# Altium PCB PCB.PcbDoc (part 3 of 3)
Units mm, origin at the board's own origin, x right, y up, seen from the top; angles counter-clockwise.
Board outline 50 x 32.5 mm, 10 copper layers (Top (GND), L2 (HS), L3 (GND), L4 (VCC), L5 (S), L6 S(), L7 (VCC), L8 (GND), L9 (VCC), Bottom (S)), stack 1.18 mm thick; 115 components, 126 nets, 603 pads, 417 vias.
Unrouted connection lines stored in the file: 2.
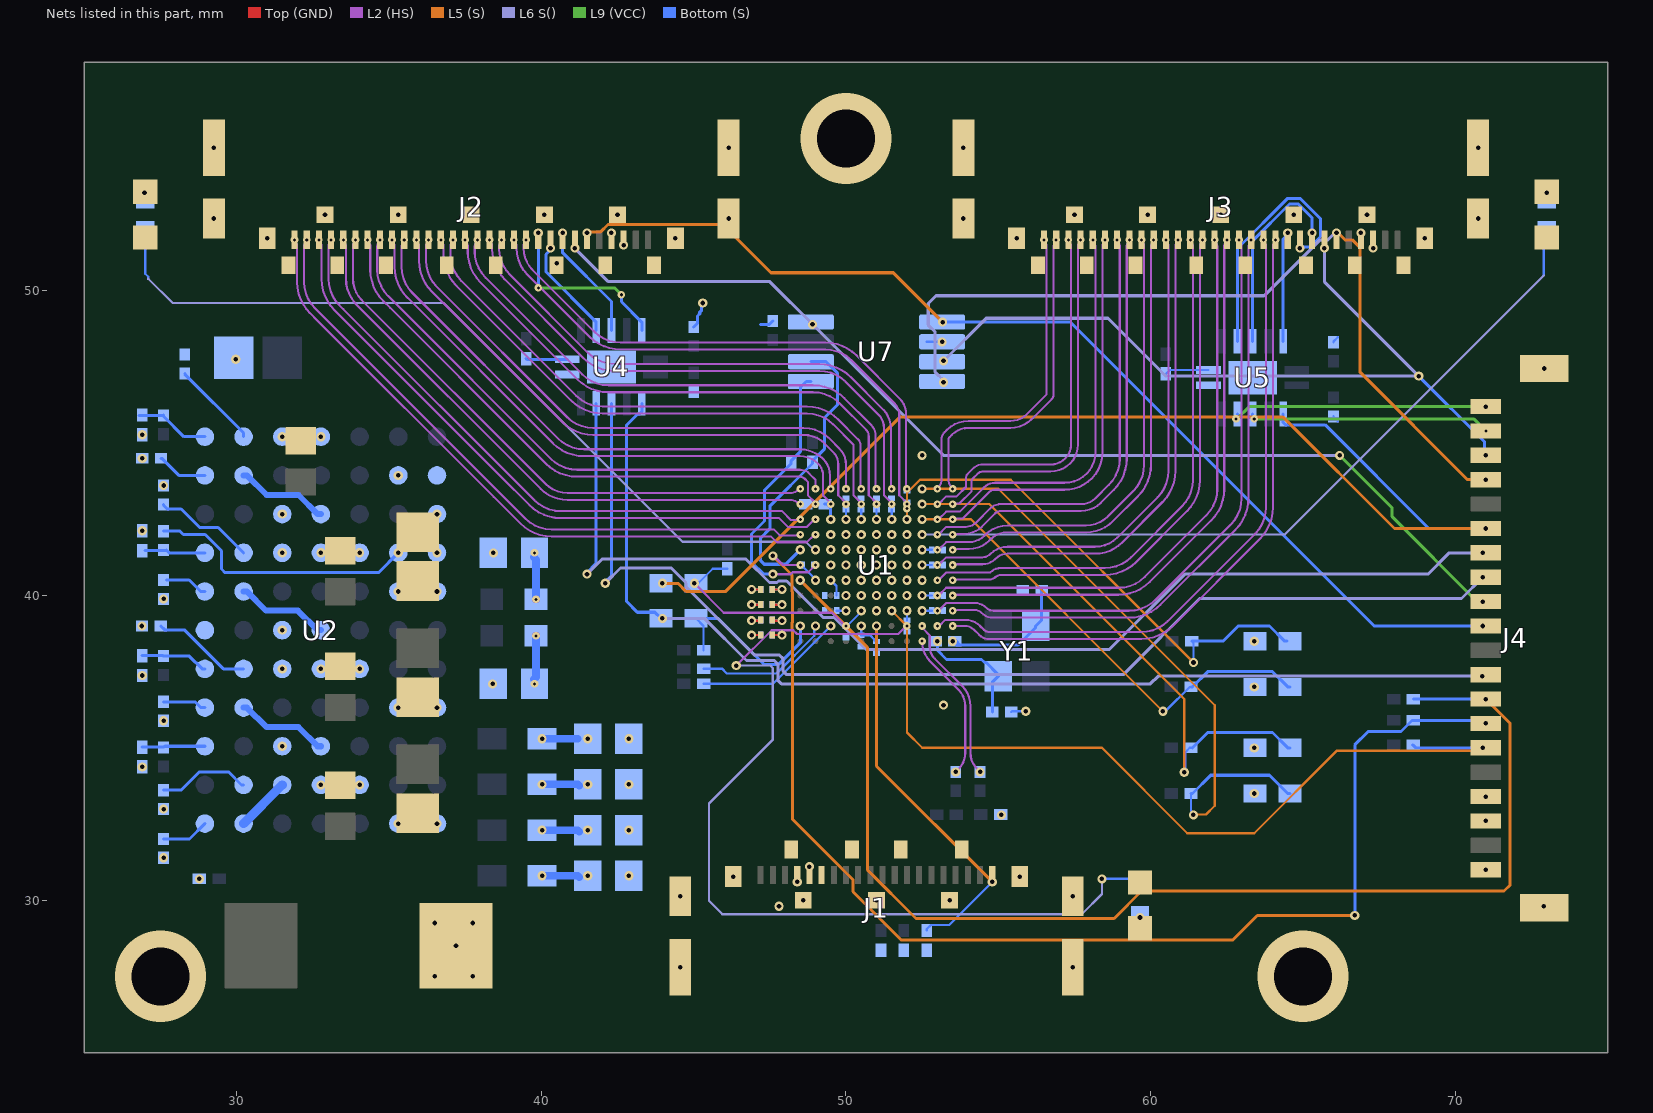
[diagram p10: the nets of this part, all layers, seen from the top]

## Via types
v1: diameter 0.3, hole 0.15, Top (GND) to Bottom (S), 287 vias
v2: diameter 0.25, hole 0.1, Top (GND) to L2 (HS), 104 vias
v3: diameter 0.25, hole 0.1, L9 (VCC) to Bottom (S), 22 vias
v4: diameter 3, hole 1.9, Top (GND) to Bottom (S), 3 vias
v5: diameter 0.25, hole 0.1, Top (GND) to Bottom (S), 1 vias

## Nets (pads, with @x,y where several pads share a name; then routed paths per layer and width w, separated by ;. In a path a pad name is that pad's centre, name@x,y a point inside that pad or via, vN(x,y) a via of type N, cw(c..) or ccw(c..) an arc to the next point about the centre after c; other vN are vias at no path point) (continued)
GND: C3.2 C4.1 C5.1 C6.1 C7.1 C8.1 C9.1 C10.1 C11.1 C12.2 C13.1 C14.1 C15.1 C16.1 C17.1 C18.1 C19.1 C20.1 C21.1 C22.1 C23.1 C24.1 C25.1 C26.1 C27.1 C28.1 C29.1 C30.1 C31.1 C32.1 C33.1 C34.1 C35.1 C36.1 C37.1 C38.1 C39.1 C40.1 C41.1 C42.1 C44.1 C47.1 C48.1 C49.1 C50.1 C51.1 C53.1 C54.1 C55.1 C56.1 C57.1 C58.1 C59.1 C60.2 D8.2 D9.2 D10.2 J1.4 J1.5 J1.6 J1.S1 J1.S2 J1.S3 J1.S4 J1.S5 J1.S6 J1.S7 J1.S8 J1.S9 J1.S10 J1.S11 J1.S12 J1.S13 J2.3 J2.4 J2.S1 J2.S2 J2.S3 J2.S4 J2.S5 J2.S6 J2.S7 J2.S8 J2.S9 J2.S10 J2.S11 J2.S12 J2.S13 J2.S14 J2.S15 J2.S16 J2.S17 J2.S18 J2.S19 J3.3 J3.4 J3.S1 J3.S2 J3.S3 J3.S4 J3.S5 J3.S6 J3.S7 J3.S8 J3.S9 J3.S10 J3.S11 J3.S12 J3.S13 J3.S14 J3.S15 J3.S16 J3.S17 J3.S18 J3.S19 J4.3 J4.4 J4.21 J4.22 R5.1 R7.1 R14.1 R20.1 R21.2 R22.1 R30.1 R31.1 R32.1 R33.1 R43.1 R44.1 R45.1 R46.1 U1.E4 U1.E5 U1.E6 U1.E7 U1.E8 U1.F4 U1.F5 U1.F6 U1.F7 U1.F8 U1.F9 U1.G4 U1.G5 U1.G6 U1.G7 U1.G8 U1.G9 U2.A4 U2.A5 U2.B1 U2.B2 U2.C5 U2.D3 U2.D4 U2.D5 U2.E1 U2.E2 U2.F5 U2.F7 U2.G3 U2.G4 U2.G5 U2.H1 U2.H2 U2.J5 U2.K3 U2.K4 U2.L1 U2.L2 U4.7 U4.15 U5.7 U5.15 U7.6 | length 7.5
  Top (GND) w0.075: J2.S10@40.5,50.835 v1(40.5,50.9) ; v1(46.9,38.7) C6.1@47.2,38.7 ; v1(46.9,39.175) 47.175,39.175 C11.1@47.2,39.2 ; v1(46.9,39.7) C10.1@47.2,39.7 ; v1(46.9,40.2) C8.1@47.2,40.2 ; v1(50,40.5) U1.E8@50,40.515 ; v1(51,40.5) U1.E6@51,40.515 ; v1(51.5,40.5) U1.E5@51.5,40.515 ; v1(52,41) 52.015,41 U1.F4@52.038,40.977
  Top (GND) w0.1: v1(32.766,37.592) 33.317,37.592 C34.1@33.4,37.675 ; v1(32.766,41.402) 33.327,41.402 C33.1@33.4,41.475 33.473,41.402 v1(34.036,41.402) ; v1(72.9,29.8) 72.92,29.78 J4.21@72.92,29.75
  Bottom (S) w0.075: v1(46.9,38.7) C7.1@47.2,38.7 ; v1(46.9,39.175) 47.175,39.175 C5.1@47.2,39.2 ; v1(46.9,39.7) C9.1@47.2,39.7 ; v1(46.9,40.2) C4.1@47.2,40.2 ; U7.6@52.65,48.325 v1(53.155,48.325) ; C12.2@55.422,36.175 55.447,36.2 v1(55.9,36.2) ; C41.1@66,45.88 66,45.855 C41.1@66.138,45.718 ; C42.1@66,48.31 66,48.335 C42.1@66.138,48.472
  Bottom (S) w0.1: C40.1@45,48.81 45.125,48.935 45.125,49.171 45.2,49.246 45.2,49.3 45.262,49.362 45.262,49.562 v1(45.3,49.6) ; 47.2,48.9 47.49,48.9 C44.1@47.6,49.01 ; R43.1@55.075,32.81 55.09,32.81 v1(55.1,32.8)
  other v1: 36.5,27.5 37.75,27.5 44.555,27.8 57.445,27.8 37.2,28.5 36.5,29.25 37.75,29.25 47.8,29.8 48.6,30 51,30 53.4,30 44.555,30.125 57.445,30.125 48.4,30.6 28.775,30.7 46.3,30.775 55.7,30.775 42.875,30.8 48.8,31.1 27.6,31.39 42.875,32.3 35.306,32.512 36.576,32.512 71,32.6 27.6,32.99 71,33.4 63.4,33.5 32.766,33.782 34.036,33.782 42.875,33.8 26.9,34.375 63.4,35 31.496,35.052 42.875,35.3 27.6,35.89 35.306,36.322 36.576,36.322 53.2,36.4 63.4,37 38.4,37.1 26.9,37.375 31.496,37.592 34.036,37.592 63.4,38.5 31.496,38.862 26.89,39 27.6,39.89 35.306,40.132 36.576,40.132 50.5,40.5 52,40.5 49.5,41 50,41 50.5,41 51,41 51.5,41 31.496,41.402 38.425,41.4 49.5,41.5 50,41.5 50.5,41.5 51,41.5 51.5,41.5 52,41.5 26.9,42.125 31.496,42.672 27.6,43.61 35.306,43.942 26.9,44.5 52.5,44.6 31.496,45.212 32.766,45.212 26.9,45.275 72.92,47.45 29.972,47.752 67.3,51.4 42.7,51.5 31,51.725 44.4,51.725 55.6,51.725 69,51.725 42.3,51.9 66.9,51.9 29.255,52.375 46.145,52.375 53.855,52.375 70.745,52.375 32.9,52.5 35.3,52.5 37.7,52.5 40.1,52.5 42.5,52.5 57.5,52.5 59.9,52.5 62.3,52.5 64.7,52.5 67.1,52.5 29.255,54.7 46.145,54.7 53.855,54.7 70.745,54.7
  other v4: 27.5,27.5 65,27.5 50,55
GPIO0: R6.1 R33.2 U1.L3 | length 21.1
  L5 (S) w0.075: v1(52.5,43.5) 55,43.5 62.1,36.4 62.1,33.1 61.812,32.813 61.413,32.813 v1(61.4,32.8)
  Bottom (S) w0.075: R6.1@61.325,33.5 61.325,32.936 61.4,32.861 v1(61.4,32.8)
  Bottom (S) w0.1: R6.1@61.325,33.5 61.37,33.5 61.97,34.1 63.9,34.1 64.5,33.5 R33.2@64.575,33.5
GPIO1: R8.1 R32.2 U1.K3 | length 18.4
  L5 (S) w0.075: v1(52.5,43) 54.7,43 61.1,36.6 v1(61.1,34.2) v1@61.1,34.078
  Bottom (S) w0.075: v1(61.1,34.2) 61.143,34.243 61.143,34.863 61.28,35 R8.1@61.325,35 R8.1@61.37,35
  Bottom (S) w0.1: R8.1@61.37,35 61.87,35.5 64,35.5 64.5,35 R32.2@64.575,35
GPIO2: R9.1 R31.2 U1.J3 | length 15.4
  L5 (S) w0.075: v1(52.5,42.5) 54.1,42.5 v1(60.4,36.2)
  Bottom (S) w0.075: v1(60.4,36.2) 60.443,36.243 60.523,36.243 61.28,37 R9.1@61.325,37
  Bottom (S) w0.1: R9.1@61.325,37 61.37,37 61.87,37.5 64,37.5 64.5,37 R31.2@64.575,37
GPIO3: R10.1 R30.2 U1.J4 | length 17.2
  L5 (S) w0.075: v1(52,42.5) 52,43.371 52.429,43.8 55.406,43.8 v1(61.406,37.8)
  Bottom (S) w0.075: R10.1@61.35,38.5 61.406,38.444 v1(61.406,37.8)
  Bottom (S) w0.1: R10.1@61.35,38.5 62.372,38.5 62.872,39 63.9,39 64.4,38.5 R30.2@64.475,38.5
GPIO4/RST_TX1: R11.1 R23.2 U1.B8 | length 6.8
  L2 (HS) w0.075: v1(45.025,40.4) 45.988,39.437 49.539,39.437 49.977,39 v2(50,39)
  Bottom (S) w0.075: v1(45.025,40.4) 45.15,40.4 45.625,40.875 R11.1@46.1,40.875
GPIO5: R12.1 U1.B9 | length 5
  Bottom (S) w0.075: R12.1@45.325,37.1 47.6,37.1 v1(49.5,39)
  Bottom (S) w0.1: v1@49.5,38.946 v1(49.5,39)
GPIO6: R13.1 U1.B10 | length 4.6
  Bottom (S) w0.075: R13.1@45.325,37.6 45.927,37.6 46.089,37.437 47.717,37.437 48.957,38.677 48.957,38.957 v1(49,39)
GPIO7/RST_TX0: R15.1 R24.2 U1.B11 | length 6
  Bottom (S) w0.075: R24.2@45.075,39.25 45.325,39 R15.1@45.325,38.2
  Bottom (S) w0.1: R24.2@45.075,39.25 45.8,39.25 47.31,37.74 47.79,37.74 48.5,38.45 v1(48.5,39)
HPD: J1.20 R46.2 U1.B6 | length 12.8
  L5 (S) w0.1: v1(51,39) 51,34.4 v1(54.8,30.6)
  Bottom (S) w0.075: R46.2@52.65,29.005 52.65,29.05 52.787,29.188 53.388,29.188 v1(54.8,30.6)
INTVCC1: U2.B6 U2.C4 | length 3.1
  Bottom (S) w0.2: U2.B6@30.226,43.942 30.337,43.942 30.981,43.298 32.029,43.298 32.655,42.672 U2.C4@32.766,42.672
INTVCC2: U2.E6 U2.F4 | length 3.1
  Bottom (S) w0.2: U2.E6@30.226,40.132 30.337,40.132 30.963,39.506 32.011,39.506 32.655,38.862 U2.F4@32.766,38.862
INTVCC3: U2.H6 U2.J4 | length 3.1
  Bottom (S) w0.2: U2.H6@30.226,36.322 30.337,36.322 30.981,35.678 32.029,35.678 32.655,35.052 U2.J4@32.766,35.052
INTVCC4: U2.K5 U2.L6 | length 1.8
  Bottom (S) w0.3: U2.L6@30.226,32.512 U2.K5@31.496,33.782
MSCL: R18.1 U1.F10 U7.1 | length 9.2
  L2 (HS) w0.075: v1(47.6,40.7) 48.18,40.7 48.243,40.763 48.763,40.763 v2(49,41)
  Bottom (S) w0.1: v1(47.6,40.7) 47.596,40.704 47.296,40.704 46.9,41.1 46.9,42.018 47.325,42.443 47.325,43.455 48.2,44.33 R18.1@48.2,44.375 48.2,44.42 48.5,44.72 48.5,46.826 48.699,47.025 U7.1@48.845,47.025
MSDA: R19.1 U1.G11 U7.2 | length 9.8
  Bottom (S) w0.1: v1(48.5,41.5) 48.025,41.025 47.317,41.025 47.2,41.142 47.2,41.886 47.5,42.186 47.5,42.93 48.9,44.33 R19.1@48.9,44.375 48.9,44.42 49.3,44.82 49.3,45.843 49.725,46.268 49.725,47.293 49.343,47.675 U7.2@48.845,47.675
NetC43_1: C43.1 R5.2 U2.G7 | length 2.2
  Bottom (S) w0.1: R5.2@26.9,38.025 27.585,38.025 C43.1@27.6,38.01 28.448,38.01 28.866,37.592 U2.G7@28.956,37.592
NetC45_1: C45.1 R20.2 U2.D7 | length 2
  Bottom (S) w0.1: R20.2@27,41.475 27.685,41.475 27.7,41.49 27.788,41.402 U2.D7@28.956,41.402
NetC46_1: C46.1 R22.2 U2.A7 | length 2.5
  Bottom (S) w0.1: R22.2@26.8,45.91 27.585,45.91 27.6,45.925 27.6,45.88 28.268,45.212 U2.A7@28.956,45.212
NetC47_2: C47.2 U2.G6 | length 3.3
  Bottom (S) w0.1: C47.2@27.51,39 27.635,38.875 28.281,38.875 29.564,37.592 U2.G6@30.226,37.592
NetC48_2: C48.2 U2.D6 | length 3.3
  Bottom (S) w0.1: C48.2@27.6,42.99 27.6,42.965 27.725,42.84 28.18,42.84 28.786,42.234 29.394,42.234 U2.D6@30.226,41.402
NetC49_2: C49.2 U2.A6 | length 2.9
  Bottom (S) w0.1: C49.2@28.3,47.29 28.3,47.265 30.226,45.339 U2.A6@30.226,45.212
NetC52_1: C52.1 R14.2 U2.J7 | length 2.1
  Bottom (S) w0.1: R14.2@26.9,35.025 27.615,35.025 27.642,35.052 U2.J7@28.956,35.052
NetC53_2: C53.2 U2.K6 | length 3.1
  Bottom (S) w0.1: C53.2@27.6,33.61 28.176,33.61 28.778,34.212 29.73,34.212 30.16,33.782 U2.K6@30.226,33.782
NetC54_2: C54.2 U2.B7 | length 1.7
  Bottom (S) w0.1: C54.2@27.52,44.5 27.545,44.5 28.103,43.942 U2.B7@28.956,43.942
NetC55_2: C55.2 U2.E7 | length 1.4
  Bottom (S) w0.1: C55.2@27.7,40.51 28.44,40.51 28.818,40.132 U2.E7@28.956,40.132
NetC56_2: C56.2 U2.H7 | length 1.4
  Bottom (S) w0.1: C56.2@27.6,36.51 28.63,36.51 28.818,36.322 U2.H7@28.956,36.322
NetC57_2: C57.2 U2.L7 | length 1.6
  Bottom (S) w0.1: C57.2@27.6,32.01 28.454,32.01 U2.L7@28.956,32.512
NetD8_1: D8.1 R34.2
  other v1: 59.65,29.43
NetD9_1: D9.1 R35.2 | length 0
  Top (GND) w0.075: v1(26.975,53.225) D9.1@27,53.25
NetD10_1: D10.1 R36.2 | length 0
  Top (GND) w0.075: v1(73,53.225) D10.1@73,53.25
NetR2_2: R2.2 U4.8 | length 1.4
  Bottom (S) w0.1: R2.2@39.5,47.775 39.525,47.75 U4.8@40.852,47.75
NetR3_2: R3.2 U5.8 | length 1.5
  Bottom (S) w0.075: R3.2@60.5,47.275 60.625,47.4 U5.8@61.9,47.4
NetR7_2: R7.2 U1.J9 | length 0.6
  Bottom (S) w0.1: R7.2@49.3,43 R7.2@49.325,43 49.37,43 49.495,42.875 49.495,42.505 v1(49.5,42.5)
RST_TX0: J4.9 R24.1 U4.2 | length 36.4
  L6 S() w0.1: v1(43.975,39.25) 45.35,39.25 46.735,37.865 47.645,37.865 47.763,37.748 47.763,37.217 47.88,37.1 59.991,37.1 60.245,37.354 v1(70.89,37.354)
  Bottom (S) w0.1: U4.2@43.3,46.306 43.3,46.027 43.223,45.95 43.154,45.95 42.8,45.596 42.8,39.8 43.15,39.45 43.725,39.45 R24.1@43.925,39.25 v1(43.975,39.25)
RST_TX0_1V8: J2.10 U4.13 | length 6.1
  L9 (VCC) w0.1: v3(39.9,50.1) 42.4,50.1 v3(42.629,49.871)
  Bottom (S) w0.1: v3(39.9,50.1) v1(39.9,51.9) ; v3@42.6,49.9 v3(42.629,49.871) 42.629,49.645 43.3,48.973 U4.13@43.3,48.694
RST_TX1: J4.15 R23.1 U5.2 | length 39.4
  L5 (S) w0.1: v1(43.975,40.4) 44.484,40.4 44.759,40.125 46.036,40.125 51.766,45.855 64.348,45.855 68.003,42.2 v1(71,42.2)
  Bottom (S) w0.1: R23.1@43.925,40.4 v1(43.975,40.4) ; U5.2@64.348,45.956 64.348,45.677 64.425,45.6 65.728,45.6 69.128,42.2 v1(71,42.2)
RST_TX1_1V8: J3.10 U5.13 | length 3.6
  Bottom (S) w0.1: U5.13@64.348,48.344 64.348,51.694 64.5,51.846 v1(64.5,51.9)
RSTN: J4.6 R4.1 U1.C5 | length 28
  L5 (S) w0.075: v1(51.5,39.5) 52,39 52,35.5 52.5,35 58.4,35 61.2,32.2 63.4,32.2 66.1,34.9 70.8,34.9 v1(70.9,35)
  Bottom (S) w0.1: R4.1@68.6,35.1 68.7,35 v1(70.9,35)
RX_AUX_N: C2.2 U1.B3 | length 5.5
  L2 (HS) w0.071: v2(52.5,39) 52.5,38.938 52.75,38.688 52.75,38.325 ccw(c53.311,38.325) 52.914,37.928 53.812,37.03 cw(c53.152,36.37) 54.086,36.37 54.086,34.84 ccw(c54.848,34.84) 54.309,34.301 v1(54.4,34.21)
RX_AUX_P: C1.2 U1.A3 | length 4.9
  L2 (HS) w0.071: v2(52.5,38.5) 52.5,38.487 ccw(c53.433,38.487) 52.773,37.827 53.691,36.909 cw(c53.152,36.37) 53.914,36.37 53.914,34.84 cw(c53.152,34.84) 53.691,34.301 v1(53.6,34.21)
RXSTS: R34.1 U1.B4 | length 31.1
  L2 (HS) w0.075: v1(46.4,37.7) 47.563,38.863 48.266,38.863 48.391,38.738 49.098,38.738 49.848,38.737 50.598,38.738 51.714,38.737 51.977,39 v2(52,39)
  L6 S() w0.075: v1(46.4,37.7) 46.934,37.7 46.936,37.702 47.512,37.702 47.6,37.614 47.6,35.27 45.5,33.17 45.5,29.98 45.942,29.537 57.737,29.537 58.4,30.2 v1(58.4,30.7)
  Bottom (S) w0.075: v1(58.4,30.7) 59.53,30.7 R34.1@59.65,30.58
SCL_TX0: J2.6 J4.11 U7.5 | length 35
  L5 (S) w0.1: v1(41.5,51.9) 41.538,51.938 41.949,51.938 42.186,52.175 45.956,52.175 47.538,50.593 51.551,50.593 v1(53.171,48.974)
  Bottom (S) w0.1: v1(53.171,48.974) 57.366,48.974 67.339,39 v1(70.9,39)
SCL_TX1: J3.6 J4.17 U7.8 | length 27.8
  L5 (S) w0.1: v1(66.1,51.9) 66.154,51.9 66.379,51.675 66.614,51.675 66.875,51.414 66.875,47.325 70.4,43.8 v1(71,43.8)
  L6 S() w0.1: v1(53.2,47) 53.2,47.054 52.925,47.329 52.925,48.65 52.7,48.875 52.7,49.583 52.955,49.838 63.727,49.838 65.564,51.675 65.821,51.675 66.046,51.9 v1(66.1,51.9)
SDA_TX0: J2.7 J4.12 U7.4 | length 34.8
  L9 (VCC) w0.1: v1(66.2,44.6) 67.925,42.875 67.925,42.586 70.673,39.838 70.862,39.838 v1(70.9,39.8)
  L6 S() w0.1: v1(41.1,51.4) 42.2,50.3 47.5,50.3 v1(48.9,48.9) 53.2,44.6 v1(66.2,44.6)
SDA_TX1: J3.7 J4.18 U7.7 | length 26
  L6 S() w0.1: v1(53.2,47.7) 54.6,49.1 58.6,49.1 60.5,47.2 v1(68.8,47.2) 65.7,50.3 v1(65.7,51.4)
  Bottom (S) w0.1: v1(68.8,47.2) 70.962,45.038 70.962,44.638 v1(71,44.6)
SSCL: J4.7 R16.1 U1.F11 | length 40.9
  L2 (HS) w0.075: v1(47.6,41.3) 47.636,41.3 47.936,41 v2(48.5,41)
  L5 (S) w0.1: v1(47.6,41.3) 48.225,40.675 48.225,40.13 48.25,40.106 48.25,39.139 48.225,39.114 48.225,38.886 48.25,38.861 48.25,32.65 50.228,30.672 50.228,30.278 51.805,28.7 62.7,28.7 63.5,29.5 v1(66.7,29.5)
  Bottom (S) w0.1: v1(66.7,29.5) 66.7,35.1 67.139,35.539 68.219,35.539 68.58,35.9 70.846,35.9 70.946,35.8 v1(71,35.8)
SSDA: J4.8 R17.1 U1.E11 | length 41.4
  L5 (S) w0.1: v1(48.5,40.5) 50.7,38.3 50.7,31 52.3,29.4 58.8,29.4 59.7,30.3 71.6,30.3 71.8,30.5 71.8,35.8 v1(71,36.6)
  Bottom (S) w0.1: R17.1@68.625,36.6 v1(71,36.6)
TE1_TX0: J4.13 U4.4 | length 38.1
  L6 S() w0.1: v1(42.1,40.4) 42.6,40.9 44.265,40.9 44.75,40.415 44.75,40.286 46.996,38.04 47.82,38.04 47.938,37.923 47.938,37.517 48.055,37.4 59.1,37.4 61.6,39.9 70.2,39.9 v1(70.9,40.6)
  Bottom (S) w0.1: v1(42.1,40.4) 42.1,40.454 42.3,40.654 U4.4@42.3,46.306
TE1_TX0_1V8: J2.8 U4.11 | length 3.9
  Bottom (S) w0.1: v1(40.7,51.9) 40.7,51.248 42.3,49.648 U4.11@42.3,48.694
TE1_TX1: J4.19 U5.4 | length 7.9
  L9 (VCC) w0.1: v3(63.4,45.8) 70.6,45.8 v5(71,45.4)
  Bottom (S) w0.1: U5.4@63.348,45.956 63.348,45.852 v3(63.4,45.8)
TE1_TX1_1V8: J3.8 U5.11 | length 6.4
  Bottom (S) w0.1: U5.11@63.348,48.344 63.348,51.643 64.555,52.85 64.845,52.85 65.295,52.4 65.295,51.905 v1(65.3,51.9)
TE2_TX0: J4.14 U4.5 | length 37.9
  L6 S() w0.1: v1(41.5,40.7) 42,41.2 46.711,41.2 47.486,40.425 47.736,40.425 47.786,40.475 48.054,40.475 49.254,39.275 49.614,39.275 50.664,38.225 58.644,38.225 61.119,40.7 69.1,40.7 69.8,41.4 v1(70.9,41.4)
  Bottom (S) w0.1: v1(41.5,40.7) 41.5,40.754 41.8,41.054 U4.5@41.8,46.306
TE2_TX0_1V8: J2.9 U4.10 | length 3.5
  Bottom (S) w0.1: v1(40.3,51.4) 40.3,51.346 40.15,51.196 40.15,50.623 41.8,48.973 U4.10@41.8,48.694
TE2_TX1: J4.20 U5.5 | length 8.5
  L9 (VCC) w0.1: v3(62.8,45.8) 62.834,45.8 63.234,46.2 v1(71,46.2)
  Bottom (S) w0.1: v3(62.8,45.8) 62.848,45.848 U5.5@62.848,45.956
TE2_TX1_1V8: J3.9 U5.10 | length 8.1
  Bottom (S) w0.1: U5.10@62.848,48.344 62.848,51.39 64.483,53.025 64.917,53.025 65.575,52.367 65.575,51.786 65.227,51.438 64.938,51.438 v1(64.9,51.4)
TX0_D0_0_N: J2.18 U1.K7 | length 18.8
  L2 (HS) w0.068: v2(36.7,51.675) cw(c36.493,51.468) 36.786,51.468 36.786,51.191 ccw(c38.233,51.191) 37.21,50.167 40.982,46.396 ccw(c42.005,47.419) 42.005,45.972 48.723,45.972 cw(c48.723,44.753) 49.585,45.615 50.231,44.969 cw(c50.192,44.931) 50.247,44.931 50.247,43.289 50.5,43.035 v2(50.5,43)
TX0_D0_0_P: J2.17 U1.L7 | length 18.2
  L2 (HS) w0.068: v2(37.1,51.675) ccw(c37.307,51.468) 37.014,51.468 37.014,51.191 ccw(c38.233,51.191) 37.371,50.329 41.143,46.557 ccw(c42.005,47.419) 42.005,46.2 48.723,46.2 cw(c48.723,44.753) 49.747,45.776 50.392,45.131 cw(c50.192,44.931) 50.475,44.931 50.475,43.525 v2(50.5,43.5)
TX0_D0_1_N: J2.14 U1.K5 | length 18.5
  L2 (HS) w0.068: v2(38.3,51.675) ccw(c38.435,51.675) 38.34,51.579 cw(c38.228,51.468) 38.386,51.468 38.386,51.391 ccw(c39.833,51.391) 38.81,50.367 41.382,47.796 ccw(c42.405,48.819) 42.405,47.372 49.123,47.372 cw(c49.123,46.153) 49.985,47.015 51.067,45.933 cw(c50.635,45.5) 51.247,45.5 51.247,43.289 51.5,43.035 v2(51.5,43)
TX0_D0_1_P: J2.13 U1.L5 | length 17.9
  L2 (HS) w0.068: v2(38.7,51.675) cw(c38.565,51.675) 38.66,51.579 ccw(c38.772,51.468) 38.614,51.468 38.614,51.391 ccw(c39.833,51.391) 38.971,50.529 41.543,47.957 ccw(c42.405,48.819) 42.405,47.6 49.123,47.6 cw(c49.123,46.153) 50.147,47.176 51.229,46.094 cw(c50.635,45.5) 51.475,45.5 51.475,43.525 v2(51.5,43.5)
TX0_D0_2_N: J2.12 U1.K4 | length 18.4
  L2 (HS) w0.068: v2(39.1,51.675) ccw(c39.235,51.675) 39.14,51.579 cw(c39.028,51.468) 39.186,51.468 39.186,51.4 ccw(c40.414,51.4) 39.546,50.532 41.582,48.496 ccw(c42.605,49.519) 42.605,48.072 49.323,48.072 cw(c49.323,46.853) 50.185,47.715 51.6,46.3 cw(c51.246,45.946) 51.747,45.946 51.747,43.289 52,43.035 v2(52,43)
TX0_D0_2_P: J2.11 U1.L4 | length 17.8
  L2 (HS) w0.068: v2(39.5,51.675) cw(c39.365,51.675) 39.46,51.579 ccw(c39.572,51.468) 39.414,51.468 39.414,51.4 ccw(c40.414,51.4) 39.707,50.693 41.743,48.657 ccw(c42.605,49.519) 42.605,48.3 49.323,48.3 cw(c49.323,46.853) 50.347,47.876 51.761,46.461 cw(c51.246,45.946) 51.975,45.946 51.975,43.525 v2(52,43.5)
TX0_D0_3_N: J2.20 U1.K8 | length 18.9
  L2 (HS) w0.068: v2(35.9,51.675) ccw(c36.035,51.675) 35.94,51.579 cw(c35.828,51.468) 35.986,51.468 35.986,50.991 ccw(c37.433,50.991) 36.41,49.967 40.682,45.696 ccw(c41.705,46.719) 41.705,45.272 48.607,45.272 cw(c48.607,44.293) 49.299,44.985 49.579,44.706 cw(c49.173,44.3) 49.747,44.3 49.747,43.289 50,43.035 v2(50,43)
TX0_D0_3_P: J2.19 U1.L8 | length 18.4
  L2 (HS) w0.068: v2(36.3,51.675) cw(c36.165,51.675) 36.26,51.579 ccw(c36.372,51.468) 36.214,51.468 36.214,50.991 ccw(c37.433,50.991) 36.571,50.129 40.843,45.857 ccw(c41.705,46.719) 41.705,45.5 48.607,45.5 cw(c48.607,44.293) 49.46,45.147 49.783,44.824 cw(c49.259,44.3) 50,44.3 v2(50,43.5) v2@49.975,43.525
TX0_D0_C_N: J2.16 U1.K6 | length 18.6
  L2 (HS) w0.068: v2(37.5,51.675) ccw(c37.635,51.675) 37.54,51.579 cw(c37.428,51.468) 37.586,51.468 37.586,51.291 ccw(c39.033,51.291) 38.01,50.267 41.182,47.096 ccw(c42.205,48.119) 42.205,46.672 48.923,46.672 cw(c48.923,45.453) 49.785,46.315 50.66,45.44 cw(c50.45,45.231) 50.747,45.231 50.747,43.289 51,43.035 v2(51,43)
TX0_D0_C_P: J2.15 U1.L6 | length 18.1
  L2 (HS) w0.068: v2(37.9,51.675) cw(c37.765,51.675) 37.86,51.579 ccw(c37.972,51.468) 37.814,51.468 37.814,51.291 ccw(c39.033,51.291) 38.171,50.429 41.343,47.257 ccw(c42.205,48.119) 42.205,46.9 48.923,46.9 cw(c48.923,45.453) 49.947,46.476 50.821,45.602 cw(c50.45,45.231) 50.975,45.231 50.975,43.525 v2(51,43.5)
TX0_D1_0_N: J2.23 U1.L10 | length 18.8
  L2 (HS) w0.068: v2(34.7,51.675) cw(c34.565,51.675) 34.66,51.579 34.657,51.576 ccw(c34.761,51.472) 34.614,51.472 34.614,50.691 ccw(c35.833,50.691) 34.971,49.829 35.2,49.6 40.315,44.485 ccw(c41.177,45.347) 41.177,44.128 48.49,44.128 cw(c48.49,43.69) 48.8,44 49,43.8 v2(49,43.5) v2@48.975,43.525
TX0_D1_0_P: J2.24 U1.K10 | length 19.3
  L2 (HS) w0.068: v2(34.3,51.675) ccw(c34.435,51.675) 34.34,51.579 34.343,51.576 cw(c34.239,51.472) 34.386,51.472 34.386,50.691 ccw(c35.833,50.691) 34.81,49.667 35.039,49.439 39.539,44.939 40.153,44.324 ccw(c41.177,45.347) 41.177,43.9 48.49,43.9 cw(c48.49,43.69) 48.639,43.839 48.747,43.731 48.747,43.289 49,43.035 v2(49,43)
TX0_D1_1_N: J2.27 U1.J11 | length 20.3
  L2 (HS) w0.068: v2(33.1,51.675) cw(c32.965,51.675) 33.06,51.579 33.057,51.576 ccw(c33.161,51.472) 33.014,51.472 33.014,50.391 ccw(c34.233,50.391) 33.371,49.529 33.5,49.4 39.775,43.125 ccw(c40.637,43.987) 40.637,42.768 47.902,42.768 48.195,42.475 48.475,42.475 v2(48.5,42.5)
TX0_D1_1_P: J2.28 U1.J10 | length 21.2
  L2 (HS) w0.068: v2(32.7,51.675) ccw(c32.835,51.675) 32.74,51.579 32.743,51.576 cw(c32.639,51.472) 32.786,51.472 32.786,50.391 ccw(c34.233,50.391) 33.21,49.367 33.339,49.239 38.639,43.939 39.614,42.963 ccw(c40.637,43.987) 40.637,42.539 47.807,42.539 48.059,42.288 48.1,42.247 48.711,42.247 48.965,42.5 v2(49,42.5)
TX0_D1_2_N: J2.29 U1.H11 | length 21.3
  L2 (HS) w0.068: v2(32.3,51.675) cw(c32.165,51.675) 32.26,51.579 32.257,51.576 ccw(c32.361,51.472) 32.214,51.472 32.214,50.291 ccw(c33.433,50.291) 32.571,49.429 32.8,49.2 39.472,42.528 ccw(c40.334,43.39) 40.334,42.171 47.629,42.171 47.825,41.975 48.475,41.975 v2(48.5,42)
TX0_D1_2_P: J2.30 U1.H10 | length 22.3
  L2 (HS) w0.068: v2(31.9,51.675) ccw(c32.035,51.675) 31.94,51.579 31.943,51.576 cw(c31.839,51.472) 31.986,51.472 31.986,50.291 ccw(c33.433,50.291) 32.41,49.267 32.639,49.039 38.439,43.239 39.31,42.367 ccw(c40.334,43.39) 40.334,41.943 47.534,41.943 47.731,41.747 48.711,41.747 48.965,42 v2(49,42)
TX0_D1_3_N: J2.21 U1.L9 | length 18.6
  L2 (HS) w0.068: v2(35.5,51.675) cw(c35.365,51.675) 35.46,51.579 ccw(c35.572,51.468) 35.414,51.468 35.414,50.791 ccw(c36.633,50.791) 35.771,49.929 40.543,45.157 ccw(c41.405,46.019) 41.405,44.8 48.485,44.8 cw(c48.485,43.719) 49.25,44.483 cw(c48.707,43.94) 49.475,43.94 49.475,43.525 v2(49.5,43.5)
TX0_D1_3_P: J2.22 U1.K9 | length 19.1
  L2 (HS) w0.068: v2(35.1,51.675) ccw(c35.235,51.675) 35.14,51.579 cw(c35.028,51.468) 35.186,51.468 35.186,50.791 ccw(c36.633,50.791) 35.61,49.767 40.382,44.996 ccw(c41.405,46.019) 41.405,44.572 48.485,44.572 cw(c48.485,43.719) 49.089,44.322 cw(c48.707,43.94) 49.247,43.94 49.247,43.289 49.5,43.035 v2(49.5,43)
TX0_D1_C_N: J2.25 U1.L11 | length 19.1
  L2 (HS) w0.068: v2(33.9,51.675) cw(c33.765,51.675) 33.86,51.579 33.857,51.576 ccw(c33.961,51.472) 33.814,51.472 33.814,50.407 ccw(c34.83,50.407) 34.112,49.688 40.138,43.662 ccw(c40.857,44.38) 40.857,43.364 44.5,43.364 46.052,43.364 48.172,43.364 ccw(c48.172,43.714) 48.419,43.466 cw(c48.5,43.386) v2(48.5,43.5)
TX0_D1_C_P: J2.26 U1.K11 | length 19.4
  L2 (HS) w0.068: v2(33.5,51.675) ccw(c33.635,51.675) 33.54,51.579 33.543,51.576 cw(c33.439,51.472) 33.586,51.472 33.586,50.407 ccw(c34.83,50.407) 33.95,49.527 39.977,43.5 ccw(c40.857,44.38) 40.857,43.136 44.5,43.136 46.052,43.136 48.172,43.136 cw(c48.172,42.786) 48.419,43.034 ccw(c48.5,43.114) v2(48.5,43)
TX0STS: R35.1 U1.G10 | length 27.2
  L6 S() w0.075: 27.1,50.4 27.9,49.6 36.8,49.6 44.637,41.763 48.679,41.763 48.942,41.5 v1(49,41.5)
  Bottom (S) w0.075: R35.1@27,51.925 27,50.561 27.1,50.461 27.1,50.4
TX1_D0_0_N: J3.18 U1.E2 | length 17.8
  L2 (HS) w0.068: v2(53,40.5) 53.035,40.5 53.289,40.753 54.731,40.753 54.739,40.761 cw(c55.073,40.427) 55.073,40.9 58.495,40.9 ccw(c58.495,42.119) 59.357,41.257 61.029,42.929 ccw(c60.167,43.791) 61.386,43.791 61.386,51.468 ccw(c61.228,51.468) 61.34,51.579 cw(c61.435,51.675) v2(61.3,51.675)
TX1_D0_0_P: J3.17 U1.E1 | length 17.6
  L2 (HS) w0.068: v2(53.5,40.5) 53.525,40.525 54.719,40.525 ccw(c54.719,40.781) 54.9,40.6 cw(c55.073,40.427) 55.073,40.672 58.495,40.672 ccw(c58.495,42.119) 59.518,41.096 61.19,42.767 ccw(c60.167,43.791) 61.614,43.791 61.614,51.468 cw(c61.772,51.468) 61.66,51.579 ccw(c61.565,51.675) v2(61.7,51.675)
TX1_D0_1_N: J3.14 U1.C2 | length 20.4
  L2 (HS) w0.068: v2(53,39.5) 53.035,39.5 53.289,39.753 54.23,39.753 cw(c54.23,39.23) 54.6,39.6 ccw(c54.841,39.841) 54.841,39.5 59.295,39.5 ccw(c59.295,40.719) 60.157,39.857 62.629,42.329 ccw(c61.767,43.191) 62.986,43.191 62.986,51.468 ccw(c62.828,51.468) 62.94,51.579 cw(c63.035,51.675) v2(62.9,51.675)
TX1_D0_1_P: J3.13 U1.C1 | length 20.1
  L2 (HS) w0.068: v2(53.5,39.5) 53.525,39.525 54.23,39.525 cw(c54.23,39.23) 54.439,39.439 ccw(c54.841,39.841) 54.841,39.272 59.295,39.272 ccw(c59.295,40.719) 60.318,39.696 62.79,42.167 ccw(c61.767,43.191) 63.214,43.191 63.214,51.468 cw(c63.372,51.468) 63.26,51.579 ccw(c63.165,51.675) v2(63.3,51.675)
TX1_D0_2_N: J3.12 U1.B2 | length 21.7
  L2 (HS) w0.068: v2(53,39) 53.056,39 53.256,39.2 53.917,39.2 cw(c53.917,38.517) 54.4,39 54.529,38.871 ccw(c54.7,39.041) 54.7,38.8 59.695,38.8 ccw(c59.695,40.019) 60.557,39.157 63.429,42.029 ccw(c62.567,42.891) 63.786,42.891 63.786,51.468 ccw(c63.628,51.468) 63.74,51.579 cw(c63.835,51.675) v2(63.7,51.675)
TX1_D0_2_P: J3.11 U1.B1 | length 21.5
  L2 (HS) w0.068: v2@53.528,38.972 v2(53.5,39) 53.9,39 cw(c53.9,38.572) 54.203,38.875 54.368,38.709 ccw(c54.7,39.041) 54.7,38.572 59.695,38.572 ccw(c59.695,40.019) 60.718,38.996 63.59,41.867 ccw(c62.567,42.891) 64.014,42.891 64.014,51.468 cw(c64.172,51.468) 64.06,51.579 ccw(c63.965,51.675) v2(64.1,51.675)
TX1_D0_3_N: J3.20 U1.F2 | length 16.6
  L2 (HS) w0.068: v2(53,41) 53.035,41 53.289,41.253 54.478,41.253 ccw(c54.478,41.622) 54.739,41.361 54.749,41.372 cw(c55.3,40.821) 55.3,41.6 58.176,41.6 ccw(c58.176,42.624) 58.9,41.9 60.229,43.229 ccw(c59.367,44.091) 60.586,44.091 60.586,51.468 ccw(c60.293,51.468) v2(60.5,51.675)
TX1_D0_3_P: J3.19 U1.F1 | length 16.4
  L2 (HS) w0.068: v2(53.5,41) 53.525,41.025 54.478,41.025 ccw(c54.478,41.622) 54.9,41.2 54.91,41.21 cw(c55.3,40.821) 55.3,41.372 58.176,41.372 ccw(c58.176,42.624) 59.061,41.739 60.39,43.067 ccw(c59.367,44.091) 60.814,44.091 60.814,51.468 cw(c61.107,51.468) v2(60.9,51.675)
TX1_D0_C_N: J3.16 U1.D2 | length 19
  L2 (HS) w0.068: v2(53,40) 53.035,40 53.289,40.253 58.948,40.253 ccw(c58.948,41.473) 59.81,40.61 61.829,42.629 ccw(c60.967,43.491) 62.186,43.491 62.186,51.468 ccw(c62.028,51.468) 62.14,51.579 cw(c62.235,51.675) v2(62.1,51.675)
TX1_D0_C_P: J3.15 U1.D1 | length 18.8
  L2 (HS) w0.068: v2@53.525,40.025 v2(53.5,40) cw(c53.561,39.939) 53.561,40.025 58.948,40.025 ccw(c58.948,41.473) 59.972,40.449 61.99,42.467 ccw(c60.967,43.491) 62.414,43.491 62.414,51.468 cw(c62.572,51.468) 62.46,51.579 ccw(c62.365,51.675) v2(62.5,51.675)
TX1_D1_0_N: J3.23 U1.H1 | length 14.2
  L2 (HS) w0.068: v2(53.5,42) 53.525,42.025 53.9,42.025 ccw(c53.9,42.81) 54.455,42.255 54.9,42.7 cw(c55.073,42.527) 55.073,42.772 57.717,42.772 ccw(c57.717,43.683) 58.361,43.039 58.79,43.467 ccw(c57.767,44.491) 59.214,44.491 59.214,51.468 cw(c59.372,51.468) 59.26,51.579 ccw(c59.165,51.675) v2(59.3,51.675)
TX1_D1_0_P: J3.24 U1.H2 | length 14.4
  L2 (HS) w0.068: v2(53,42) 53.035,42 53.289,42.253 53.931,42.253 ccw(c53.931,42.736) 54.272,42.395 54.739,42.861 cw(c55.073,42.527) 55.073,43 57.717,43 ccw(c57.717,43.683) 58.2,43.2 58.629,43.629 ccw(c57.767,44.491) 58.986,44.491 58.986,51.468 ccw(c58.828,51.468) 58.94,51.579 cw(c59.035,51.675) v2(58.9,51.675)
TX1_D1_1_N: J3.27 U1.K1 | length 12
  L2 (HS) w0.068: v2(53.5,43) 53.525,43.025 53.725,43.025 54.122,43.422 54.122,43.743 cw(c54.257,43.743) 54.161,43.839 54.32,43.997 cw(c54.5,43.817) 54.5,44.072 56.717,44.072 ccw(c56.717,44.983) 57.361,44.339 ccw(c56.751,44.949) 57.614,44.949 57.614,51.468 cw(c57.772,51.468) 57.66,51.579 ccw(c57.565,51.675) v2(57.7,51.675)
TX1_D1_1_P: J3.28 U1.K2 | length 12.2
  L2 (HS) w0.068: v2(53,43) 53.035,43 53.289,43.253 53.631,43.253 53.939,43.561 53.939,43.852 cw(c54.148,43.852) 54,44 54.159,44.159 cw(c54.5,43.817) 54.5,44.3 56.717,44.3 ccw(c56.717,44.983) 57.2,44.5 ccw(c56.751,44.949) 57.386,44.949 57.386,51.468 ccw(c57.228,51.468) 57.34,51.579 cw(c57.435,51.675) v2(57.3,51.675)
TX1_D1_2_N: J3.29 U1.L1 | length 10.8
  L2 (HS) w0.068: v2(53.5,43.5) cw(c53.828,43.828) 53.364,43.828 53.364,45.113 cw(c53.487,45.113) 53.4,45.2 53.477,45.277 cw(c54.016,44.738) 54.016,45.5 55.398,45.5 ccw(c55.398,46.49) 56.099,45.79 56.747,46.439 ccw(c56.586,46.6) 56.814,46.6 56.814,51.468 cw(c56.972,51.468) 56.86,51.579 ccw(c56.765,51.675) v2(56.9,51.675)
TX1_D1_2_P: J3.30 U1.L2 | length 10.8
  L2 (HS) w0.068: v2(53,43.5) ccw(c52.672,43.828) 53.136,43.828 53.136,45.113 cw(c53.487,45.113) 53.239,45.361 53.315,45.438 cw(c54.016,44.738) 54.016,45.728 55.398,45.728 ccw(c55.398,46.49) 55.937,45.951 56.586,46.6 56.586,51.468 ccw(c56.428,51.468) 56.54,51.579 cw(c56.635,51.675) v2(56.5,51.675)
TX1_D1_3_N: J3.21 U1.G1 | length 15.2
  L2 (HS) w0.068: v2(53.5,41.5) 53.525,41.525 54.037,41.525 ccw(c54.037,42.463) 54.7,41.8 54.74,41.84 cw(c55.3,41.279) 55.3,42.072 57.876,42.072 ccw(c57.876,43.324) 58.761,42.439 59.59,43.267 ccw(c58.567,44.291) 60.014,44.291 60.014,51.468 cw(c60.172,51.468) 60.06,51.579 ccw(c59.965,51.675) v2(60.1,51.675)
TX1_D1_3_P: J3.22 U1.G2 | length 15.5
  L2 (HS) w0.068: v2(53,41.5) 53.035,41.5 53.289,41.753 54.037,41.753 ccw(c54.037,42.463) 54.539,41.961 54.578,42.001 cw(c55.3,41.279) 55.3,42.3 57.876,42.3 ccw(c57.876,43.324) 58.6,42.6 59.429,43.429 ccw(c58.567,44.291) 59.786,44.291 59.786,51.468 ccw(c59.628,51.468) 59.74,51.579 cw(c59.835,51.675) v2(59.7,51.675)
TX1_D1_C_N: J3.25 U1.J1 | length 13
  L2 (HS) w0.068: v2(53.5,42.5) 53.525,42.525 53.825,42.525 54.681,43.381 ; 54.681,43.381 cw(c54.9,43.162) 54.9,43.472 57.176,43.472 ccw(c57.176,44.724) 58.061,43.839 ccw(c57.21,44.69) 58.414,44.69 58.414,51.468 cw(c58.572,51.468) 58.46,51.579 ccw(c58.365,51.675) v2(58.5,51.675)
TX1_D1_C_P: J3.26 U1.J2 | length 13.2
  L2 (HS) w0.068: v2(53,42.5) 53.035,42.5 53.289,42.753 53.731,42.753 54.52,43.543 cw(c54.9,43.162) 54.9,43.7 57.176,43.7 ccw(c57.176,44.724) 57.9,44 ccw(c57.21,44.69) 58.186,44.69 58.186,51.468 ccw(c58.028,51.468) 58.14,51.579 cw(c58.235,51.675) v2(58.1,51.675)
TX1STS: R36.1 U1.H3 | length 25.4
  L6 S() w0.075: v1(52.5,42) 64.4,42 72.9,50.5
  Bottom (S) w0.075: 72.9,50.5 72.9,51.825 R36.1@73,51.925
VAUX: C37.2 C45.2 J4.1 U2.C1 U2.D1 U2.D2 | length 8.9
  Bottom (S) w0.1: C45.2@27.6,42.11 28.14,42.11 28.25,42 28.966,42 29.5,41.466 29.5,40.867 29.617,40.75 34.654,40.75 v1(35.306,41.402)
  other v1: 71,31 36.576,41.402 36.576,42.672
VDD: C4.2 C5.2 C6.2 C7.2 C8.2 C9.2 C10.2 C11.2 C15.2 FB1.2 U1.D4 U1.D5 U1.D6 U1.D7 U1.D8 U1.H5 U1.H6 U1.H7 U1.H8 U1.H9 | length 3.8
  Top (GND) w0.075: C6.2@47.58,38.7 v1(47.9,38.7) ; C11.2@47.58,39.2 47.605,39.175 v1(47.9,39.175) ; C10.2@47.58,39.7 v1(47.9,39.7) ; C8.2@47.58,40.2 v1(47.9,40.2)
  Bottom (S) w0.075: C7.2@47.58,38.7 v1(47.9,38.7) ; C5.2@47.58,39.2 47.605,39.175 v1(47.9,39.175) ; C9.2@47.58,39.7 v1(47.9,39.7) ; C4.2@47.58,40.2 v1(47.9,40.2)
  Bottom (S) w0.1: C15.2@41.2,35.3 C15.2@41.25,35.25
  Bottom (S) w0.25: v1(40.025,35.3) C15.2@41.2,35.3
  other v1: 41.525,35.3 50,40 50.5,40 51,40 51.5,40 52,40 49.5,42 50,42 50.5,42 51,42 51.5,42
VDD33: C26.2 C27.2 C28.2 C29.2 C58.2 FB5.2 U1.E9 U1.G3 U1.H4 U1.J8 | length 2.8
  Bottom (S) w0.075: v1(49.5,40.5) 49.5,40.498 49.69,40.308 C28.2@49.69,40 ; v1(50,42.5) C27.2@50,42.81 ; v3(52,42.85) C26.2@52,43.06 ; v1(52.5,41.5) C29.2@52.81,41.5
  Bottom (S) w0.25: C58.2@39.75,41.25 39.825,41.175 v3(39.825,39.875)
  other v1: 52,42
  other v3: 39.775,41.4
VDD33A: C31.2 C32.2 C59.2 FB6.2 U1.C4 U1.C7 | length 2.5
  Bottom (S) w0.075: C31.2@50,38.99 50.025,38.99 50.5,39.465 v1(50.5,39.5) ; C32.2@52,39.19 v1(52,39.5)
  Bottom (S) w0.25: C59.2@39.75,37.25 39.825,37.325 v3(39.825,38.675)
  other v3: 39.775,37.1
VDDA: C16.2 C17.2 C18.2 C19.2 C25.2 FB3.2 U1.C3 U1.C8 U1.E3 U1.E10 U1.J6 | length 2.9
  Bottom (S) w0.075: C18.2@48.56,41 48.56,40.975 49,40.535 v1(49,40.5) ; C16.2@49.69,39.5 v1(50,39.5) ; v1(51,42.5) C19.2@51,42.81 ; v1(52.5,39.5) C17.2@52.81,39.5
  Bottom (S) w0.25: v1(40.025,32.3) 41.2,32.3 C25.2@41.25,32.25
  other v1: 41.525,32.3 52.5,40.5
VDDRX: C13.2 C14.2 C20.2 FB2.2 U1.B7 U1.C6 | length 2.2
  Bottom (S) w0.075: v1(50.5,39) C13.2@50.5,38.69 50.8,38.69 50.922,38.567 50.922,38.542 50.975,38.49 C14.2@51,38.49
  Bottom (S) w0.25: v1(40.025,30.8) 41.2,30.8 C20.2@41.25,30.75
  other v1: 41.525,30.8 51,39.5
VDDTX: C21.2 C22.2 C23.2 C24.2 C30.2 FB4.2 U1.D3 U1.F3 U1.J5 U1.J7 | length 2.5
  Bottom (S) w0.075: v1(50.5,42.5) C22.2@50.5,42.81 ; v1(51.5,42.5) C21.2@51.5,42.81 ; v1(52.5,40) C24.2@52.81,40 ; v1(52.5,41) C23.2@52.81,41
  Bottom (S) w0.25: v1(40.025,33.8) 41.2,33.8 C30.2@41.25,33.75
  other v1: 41.525,33.8
XIN: C3.1 R1.2 U1.A1 Y1.3 | length 4.6
  Bottom (S) w0.1: C3.1@56.422,40.175 56.422,39.197 Y1.3@56.225,39 56.225,38.95 55.65,38.375 R1.2@53.745,38.375 ; R1.2@53.745,38.375 53.625,38.375 v1(53.5,38.5) 53.62,38.5 R1.2@53.745,38.375
XOUT: C12.1 R1.1 U1.A2 Y1.1 | length 4
  Bottom (S) w0.1: v1(53,38.5) 53,38.2 53.3,37.9 54.45,37.9 54.55,37.8 54.6,37.8 55,37.4 Y1.1@55,37.35 ; C12.1@54.802,36.175 54.802,37.153 Y1.1@55,37.35 ; Y1.1@54.925,37.425 Y1.1@55,37.35
pads on no net: J1.7 U1.C9 U1.C10 U1.C11 U1.D9 U1.D10 U1.D11 U2.C2 U2.C3 U2.C7 U2.F2 U2.F3 U2.J2 U2.J3 U4.3 U4.6 U4.9 U4.12 U5.3 U5.6 U5.9 U5.12 Y1.2 Y1.4

## Polygon pours and split planes (outlines as drawn)
VDD on Bottom (S) "VDD_L10_P007" (solid, remove dead copper, pour order 7): 50,40.25 50,39.75 52.25,39.75 52.25,40.25
VDD on Bottom (S) "VDD_L10_P006" (solid, remove dead copper, pour order 6): 49.25,41.75 51.75,41.75 51.75,42.25 49.25,42.25
GND on Bottom (S) "GND_L10_P016" (solid, remove dead copper, pour order 16): 25,25 75,25 75,57.5 25,57.5
+5 on Bottom (S) "+5_L10_P015" (solid, pour order 15): 30.988,40.64 30.988,39.624 34.544,39.624 34.544,40.64
+5 on Bottom (S) "+5_L10_P014" (solid, pour order 14): 34.544,35.814 34.544,36.83 30.988,36.83 30.988,35.814
+5 on Bottom (S) "+5_L10_P013" (solid, pour order 13): 30.988,32.004 34.544,32.004 34.544,33.02 30.988,33.02
+1 on Bottom (S) "+1_L10_P012" (solid, pour order 12): 39.116,35.814 36.068,35.814 36.068,34.29 34.798,34.29 34.798,33.274 37.592,33.274 37.592,30.226 39.116,30.226
+3.3 on Bottom (S) "+3.3_L10_P011" (solid, pour order 11): 39.116,40.386 39.116,38.1 37.338,38.1 37.338,37.084 34.798,37.084 34.798,38.1 36.068,38.1 36.068,39.37 37.338,39.37 37.338,40.386
VAUX on Bottom (S) "VAUX_L10_P010" (solid, pour order 10): 37.084,43.434 37.084,40.64 34.798,40.64 34.798,41.91 36.068,41.91 36.068,43.434
+5 on Bottom (S) "+5_L10_P009" (solid, pour order 9): 34.544,44.704 34.544,43.434 30.988,43.434 30.988,44.704
+1.8 on Bottom (S) "+1.8_L10_P008" (solid, pour order 8): 33.274,44.704 33.274,45.72 30.734,45.72 30.734,48.768 30.988,48.514 37.084,48.514 37.084,44.704 36.322,44.704
VDD33A on L9 (VCC) "VDD33A_L09_P003" (solid, pour order 3): 39.1,39.3 43.4,39.3 43.4,39.9 54.2,39.9 54.2,36.4 39.1,36.4 39.1,38.2
+3.3 on L9 (VCC) "+3.3_L09_P007" (solid, remove dead copper, pour order 7): 25,25 75,25 75,57.5 25,57.5
VDD33 on L9 (VCC) "VDD33_L09_P004" (solid, pour order 4): 39.1,39.3 39.1,42.3 43.4,42.3 43.4,44.3 54.2,44.3 54.2,39.9 43.4,39.9 43.4,39.3
GND on Top (GND) "GND_L01_P000" (solid, remove dead copper, pour order 0): 25,25 75,25 75,57.5 25,57.5
+5 on L7 (VCC) (split plane): 74.999,51.051 74.98,51.047 74.964,51.036 74.953,51.02 74.949,51 74.949,49.551 34.6,49.551 34.58,49.547 34.564,49.536 34.553,49.52 34.549,49.5 34.549,45.65 34.549,43.15 34.549,39.3 34.553,39.28 34.564,39.264 34.58,39.253 34.6,39.249 39.199,39.249 39.199,36.301 33.75,36.301 33.73,36.297 33.714,36.286 33.703,36.27 33.699,36.25 33.699,28.75 33.703,28.73 33.714,28.714 33.73,28.703 33.75,28.699 39.25,28.699 39.27,28.703 39.286,28.714 39.297,28.73 39.301,28.75 39.301,29.949 45.7,29.949 45.72,29.953 45.736,29.964 48.621,32.849 69.449,32.949 69.449,25.001 25.001,25.001 25.001,57.499 74.999,57.499
+1 on L7 (VCC) (split plane): 39.199,31.5 39.199,30 39.199,28.801 33.801,28.801 33.801,36.199 39.199,36.199
VAUX on L7 (VCC) (split plane): 74.949,25.5 74.953,25.48 74.964,25.464 74.98,25.453 74.999,25.449 74.999,25.001 69.551,25.001 69.551,33 69.549,33.01 69.547,33.02 69.541,33.028 69.536,33.036 69.528,33.042 69.52,33.047 69.519,33.047 69.509,33.049 69.5,33.051 48.724,32.952 51.536,35.764 51.543,35.774 51.547,35.78 51.551,35.8 51.551,37.699 54.148,37.699 54.157,37.701 54.167,37.703 54.168,37.703 54.176,37.708 54.184,37.713 54.184,37.714 54.189,37.722 54.195,37.73 54.197,37.74 54.199,37.749 54.315,43.999 54.315,44 54.313,44.009 54.311,44.019 54.311,44.02 54.306,44.027 54.301,44.035 54.3,44.036 54.292,44.041 54.284,44.047 54.283,44.047 54.274,44.049 54.265,44.051 54.264,44.051 39.25,44.051 39.23,44.047 39.214,44.036 39.203,44.02 39.199,44 39.199,39.351 34.651,39.351 34.651,43.15 34.651,45.65 34.651,49.449 74.949,49.449
VDDRX on L7 (VCC) (split plane): 51.449,35.821 45.679,30.051 39.301,30.051 39.301,31.449 43.75,31.449 43.77,31.453 43.786,31.464 50.286,37.964 50.297,37.98 50.301,38 50.301,39.949 51.449,39.949
VDDA on L7 (VCC) (split plane): 54.098,37.801 51.551,37.801 51.551,40 51.547,40.02 51.536,40.036 51.52,40.047 51.5,40.051 50.25,40.051 50.23,40.047 50.214,40.036 50.203,40.02 50.199,40 50.199,38.021 43.729,31.551 39.301,31.551 39.301,36.25 39.301,43.949 54.212,43.949
GND on L8 (GND) (split plane): 74.49,25.51 25.51,25.51 25.51,56.99 74.49,56.99
GND on L3 (GND) (split plane): 74.49,25.51 25.51,25.51 25.51,56.99 74.49,56.99
+5 on L4 (VCC) (split plane): 33.675,45.049 33.687,44.387 33.691,44.367 33.703,44.351 33.719,44.34 33.739,44.337 34.349,44.348 34.349,40.5 34.349,39.85 34.349,36.25 34.349,35.3 34.349,28.75 34.353,28.73 34.364,28.714 34.38,28.703 34.4,28.699 39.25,28.699 39.27,28.703 39.286,28.714 39.297,28.73 39.301,28.75 39.301,32.949 55.25,32.949 55.27,32.953 55.286,32.964 55.297,32.98 55.301,33 55.301,44.949 74.49,44.949 74.49,25.51 25.51,25.51 25.51,44.849 28.3,44.849 28.32,44.853 28.336,44.864 28.347,44.88 28.351,44.9 28.351,46.149 33.654,46.149
+1 on L4 (VCC) (split plane): 39.199,34.5 39.199,33 39.199,28.801 34.451,28.801 34.451,35.3 34.451,36.199 39.199,36.199
+1.8 on L4 (VCC) (split plane): 74.449,45.051 39.25,45.051 39.23,45.047 39.214,45.036 39.203,45.02 39.199,45 39.199,44.451 34.4,44.451 34.399,44.451 33.788,44.439 33.776,45.05 33.755,46.201 33.753,46.21 33.751,46.22 33.75,46.22 33.745,46.228 33.74,46.236 33.739,46.236 33.739,46.237 33.731,46.242 33.723,46.247 33.722,46.247 33.713,46.249 33.704,46.251 28.3,46.251 28.28,46.247 28.264,46.236 28.253,46.22 28.249,46.2 28.249,44.951 25.51,44.951 25.51,56.99 74.449,56.99
VDD on L4 (VCC) (split plane): 46.949,42.25 46.953,42.23 46.964,42.214 46.98,42.203 47,42.199 52.199,42.199 52.199,40.25 52.199,38.25 52.199,36.301 46.25,36.301 46.23,36.297 46.214,36.286 46.203,36.27 46.199,36.25 46.199,34.551 39.301,34.551 39.301,44.949 46.949,44.949
VDDTX on L4 (VCC) (split plane): 55.199,33.051 39.301,33.051 39.301,34.449 46.25,34.449 46.27,34.453 46.286,34.464 46.297,34.48 46.301,34.5 46.301,36.199 52.25,36.199 52.27,36.203 52.286,36.214 52.297,36.23 52.301,36.25 52.301,38.25 52.301,40.25 52.301,42.25 52.297,42.27 52.286,42.286 52.27,42.297 52.25,42.301 47.051,42.301 47.051,44.949 55.199,44.949
VAUX on L4 (VCC) (split plane): 39.199,40.551 34.451,40.551 34.451,44.349 39.199,44.349
+3.3 on L4 (VCC) (split plane): 39.199,36.301 34.451,36.301 34.451,39.85 34.451,40.449 39.199,40.449

## Other copper
L7 (VCC) (plane layer: these items are gaps in the copper):
  lines w0.1: 39.2,39.3 34.6,39.3 34.6,43.15 34.6,45.65 34.6,49.5 75,49.5 ; 48.6,32.9 69.5,33 69.5,25 ; 51.5,37.75 54.148,37.75 54.264,44 39.25,44 39.25,31.5 ; 75,25.5 75,51 ; 39.25,31.5 43.75,31.5 50.25,38 50.25,40 51.5,40 51.5,35.8 45.7,30 39.25,30 39.25,31.5 ; 33.75,28.75 33.75,36.25 39.25,36.25 39.25,28.75 33.75,28.75
L4 (VCC) (plane layer: these items are gaps in the copper):
  lines w0.1: 25,44.9 28.3,44.9 28.3,46.2 33.704,46.2 33.725,45.05 33.738,44.388 34.4,44.4 ; 39.2,44.4 38.6,44.4 34.4,44.4 ; 39.25,36.25 34.4,36.25 ; 39.25,40.5 34.4,40.5 ; 74.5,57 74.5,45 75,45 55.25,45 ; 34.4,36.25 34.4,35.3 34.4,28.75 39.25,28.75 39.25,33 ; 34.4,36.25 34.4,39.85 34.4,40.5 ; 34.4,40.5 34.4,44.4 ; 39.25,33 39.25,34.5 ; 39.25,33 39.25,34.5 ; 39.25,33 55.25,33 55.25,45 ; 39.25,34.5 39.25,45 47,45 ; 39.25,34.5 46.25,34.5 46.25,36.25 52.25,36.25 52.25,38.25 52.25,40.25 52.25,42.25 47,42.25 47,45 ; 47,45 47.75,45 55.25,45

## Silkscreen, mask and mechanical layers (free items; w line width, h text height)
Bottom Overlay:
  text "RX Order" at 65.508,36.5 h0.81 r270
  text "Boot mode" at 65.508,32.5 h0.81 r270

## Text inside footprints (layer, text, board x,y; h text height)
U4: Mechanical 13 "*" at 42.706,46.932 h1.27 r270; Bottom Overlay "*" at 44.154,46.932 h1.27 r270
U5: Mechanical 13 "*" at 63.754,46.582 h1.27 r270